# EAGLE board pr0board_main (EAGLE 9.6.2)
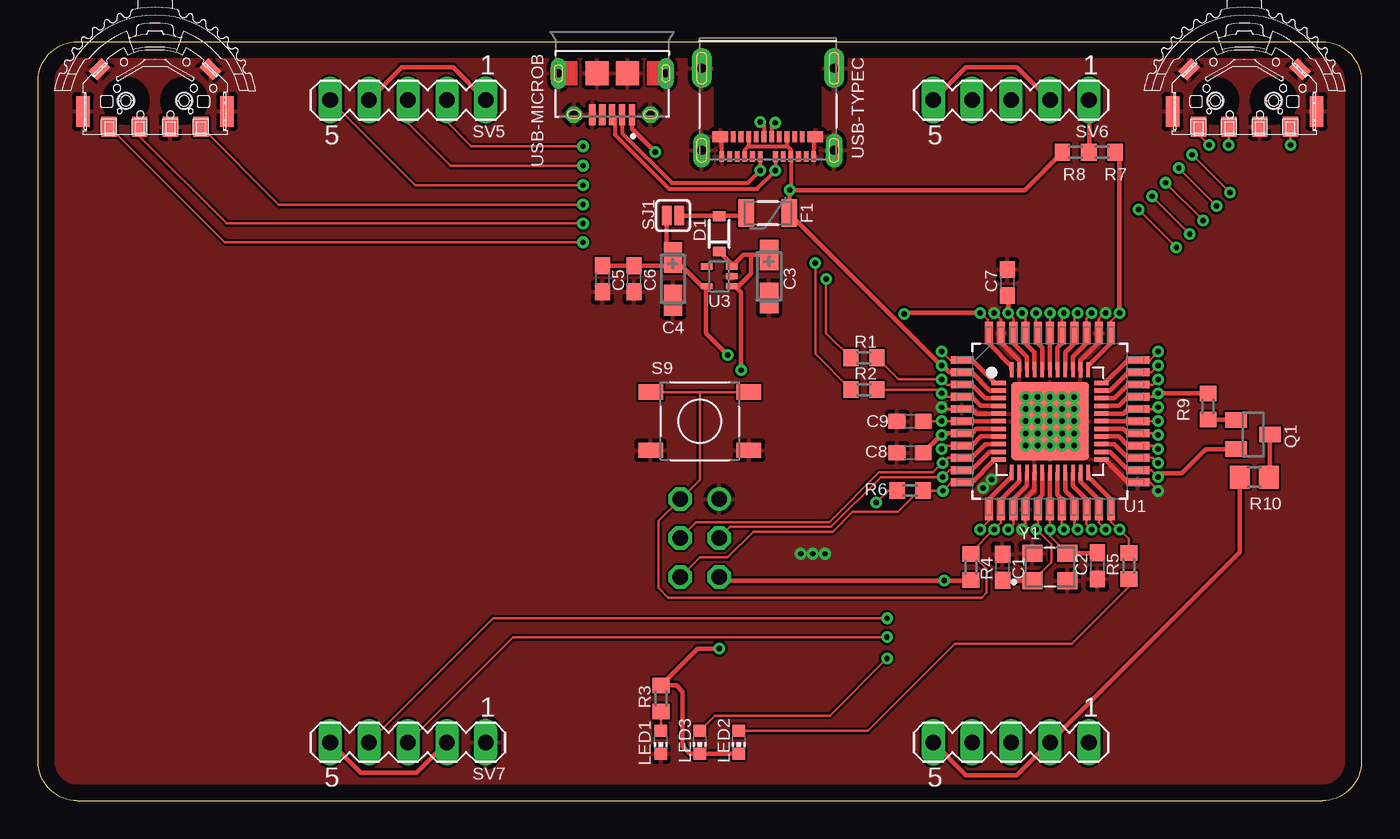
[diagram p0: board, top side]
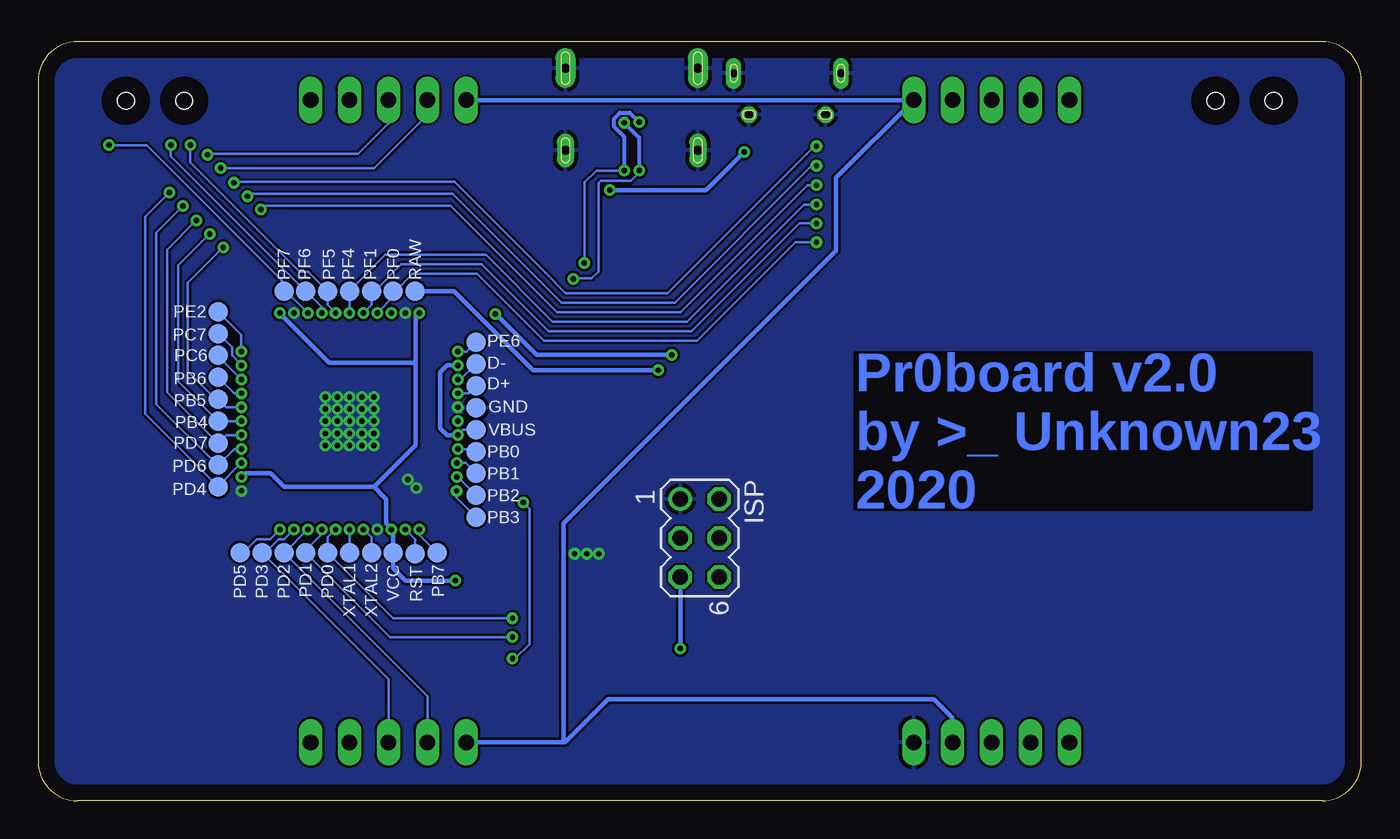
[diagram p1: board, bottom side, seen from below]

Size 86.36 x 49.53 mm. Coordinates in mm from the lower left corner, seen from the top.
Outline: 0,2.54 0,46.99 arc-90 2.54,49.53 83.82,49.53 arc-90 86.36,46.99 86.36,2.54 arc-90 83.82,0 2.54,0 arc-90 0,2.54
Copper layers (1*16): Top 0.035mm / dielectric 1.5mm / Bottom 0.035mm
Design rules "default": minimum track width 6mil, minimum drill 0.35mm, track to track 6mil, track to pad 6mil, pad to pad 6mil, via to via 6mil, smd to smd 6mil, copper to edge 40mil, drill to drill 6mil, minimum pad ring 10mil, minimum via ring 8mil, stop-mask expansion 4mil, vias tented up to drill 0mil, thermal gap 10mil

## Footprints (pad centres in the part's own frame; a part is rotated, then mirrored left to right if it is on the bottom)
C0603 = smd 1.1 x 1: 1 -0.85,0; 2 0.85,0
CT3216 = smd 2 x 1.2: + -1.4,0; - 1.4,0
SOD-323 = smd 0.63 x 0.83: 1 -1.15,0; 2 1.15,0
B1,27 = smd 1.27 x 1.27: TP 0,0
PTC-1206 = smd 1 x 1.8: 1 -1.4,0; 2 1.4,0
MA03-2 = drill 1.016: 1 -2.54,-1.27 | drill 1.016 octagon: 2 -2.54,1.27; 3 0,-1.27; 4 0,1.27; 5 2.54,-1.27; 6 2.54,1.27
CHIP-LED0603 = smd 0.8 x 0.8: A 0,-0.75; C 0,0.75
SOT23 = smd 1 x 1.4: 1 -0.95,-1.1; 2 0.95,-1.1; 3 0,1.1
R0603 = smd 1 x 1.1: 1 -0.85,0; 2 0.85,0
R0805 = smd 1.3 x 1.5: 1 -0.95,0; 2 0.95,0
SW_PTS525SM15SMTR2LFS = smd 1.6 x 1: 1 -3.2,1.9; 2 3.2,1.9; 3 -3.2,-1.9; 4 3.2,-1.9
SJ_2S = smd 0.635 x 1.27: 1 -0.412,0; 2 0.412,0
MA05-1 = drill 1.016 long: 1 -5.08,0; 2 -2.54,0; 3 0,0; 4 2.54,0; 5 5.08,0
QFP80P1200X1200X120-44N = smd 1.473 x 0.508: 1 -5.74,3.988; 2 -5.74,3.2; 3 -5.74,2.388; 4 -5.74,1.6; 5 -5.74,0.787; 6 -5.74,0; 7 -5.74,-0.787; 8 -5.74,-1.6; 9 -5.74,-2.388; 10 -5.74,-3.2; 11 -5.74,-3.988; 23 5.74,-3.988; 24 5.74,-3.2; 25 5.74,-2.388; 26 5.74,-1.6; 27 5.74,-0.787; 28 5.74,0; 29 5.74,0.787; 30 5.74,1.6; 31 5.74,2.388; 32 5.74,3.2; 33 5.74,3.988 | smd 0.508 x 1.473: 12 -3.988,-5.74; 13 -3.2,-5.74; 14 -2.388,-5.74; 15 -1.6,-5.74; 16 -0.787,-5.74; 17 0,-5.74; 18 0.787,-5.74; 19 1.6,-5.74; 20 2.388,-5.74; 21 3.2,-5.74; 22 3.988,-5.74; 34 3.988,5.74; 35 3.2,5.74; 36 2.388,5.74; 37 1.6,5.74; 38 0.787,5.74; 39 0,5.74; 40 -0.787,5.74; 41 -1.6,5.74; 42 -2.388,5.74; 43 -3.2,5.74; 44 -3.988,5.74
QFN44G-0.5-7X7MM = smd 1 x 0.3: 1 -3.35,2.5; 2 -3.35,2; 3 -3.35,1.5; 4 -3.35,1; 5 -3.35,0.5; 6 -3.35,0; 7 -3.35,-0.5; 8 -3.35,-1; 9 -3.35,-1.5; 10 -3.35,-2; 11 -3.35,-2.5; 23 3.35,-2.5; 24 3.35,-2; 25 3.35,-1.5; 26 3.35,-1; 27 3.35,-0.5; 28 3.35,0; 29 3.35,0.5; 30 3.35,1; 31 3.35,1.5; 32 3.35,2; 33 3.35,2.5 | smd 0.3 x 1: 12 -2.5,-3.35; 13 -2,-3.35; 14 -1.5,-3.35; 15 -1,-3.35; 16 -0.5,-3.35; 17 0,-3.35; 18 0.5,-3.35; 19 1,-3.35; 20 1.5,-3.35; 21 2,-3.35; 22 2.5,-3.35; 34 2.5,3.35; 35 2,3.35; 36 1.5,3.35; 37 1,3.35; 38 0.5,3.35; 39 0,3.35; 40 -0.5,3.35; 41 -1,3.35; 42 -1.5,3.35; 43 -2,3.35; 44 -2.5,3.35 | smd 5.08 x 5.08: TAB 0,0
SC70 = smd 0.4 x 0.75: 1 -0.65,-0.825; 2 0,-0.825; 3 0.65,-0.825; 4 0.65,0.825; 5 -0.65,0.825
TM-2024A = smd 1 x 1.3: 1 3,-0.95; 2 -3,-0.95; C 1,-0.95; T -1,-0.95 | smd 0.9 x 2: GND0 -4.7,0.05; GND3 4.7,0.05 | smd 1.2 x 0.8 rotated 45: GND1 -3.62,2.8 | smd 1.2 x 0.8 rotated 315: GND2 3.62,2.8 | hole 1.1: -1.9,0.75; 1.9,0.75
AMPHENOL_10118194-0001LF = smd 0.4 x 1.35: 1 -1.3,2.7; 2 -0.65,2.7; 3 0,2.7; 4 0.65,2.7; 5 1.3,2.7 | drill 0.55 pad 0.65 octagon: S1 -2.5,2.7; S2 2.5,2.7 | drill 0.5 pad 0.775 long: S3 -3.5,0; S6 3.5,0 | smd 1.5 x 1.55: S4 -1,0; S5 1,0
MOLEX_105450-0101 = smd 0.3 x 0.7: A1 -3,3.77; A2 -2.5,3.77; A3 -2,3.77; A4 -1.5,3.77; A5 -1,3.77; A6 -0.5,3.77; A7 0.5,3.77; A8 1,3.77; A9 1.5,3.77; A10 2,3.77; A11 2.5,3.77; A12 3,3.77; B2 2.25,2.47; B3 1.75,2.47; B4 1.25,2.47; B5 0.75,2.47; B6 0.25,2.47; B7 -0.25,2.47; B8 -0.75,2.47; B9 -1.25,2.47; B10 -1.75,2.47; B11 -2.25,2.47 | smd 1 x 0.7: B1 3.1,2.47; B12 -3.1,2.47 | drill 0.6 pad 1.1 long: S1 -4.32,3.36; S2 4.32,3.36 | drill 0.6 pad 1.3 long: S3 -4.32,-2; S4 4.32,-2
XTAL_ECS-160-18-33Q-DS = smd 1.3 x 1.1: 1 -1.15,-0.9; 2 1.15,-0.9; 3 1.15,0.9; 4 -1.15,0.9

## Placement (x,y rotation side)
C1  22pF  [C0603]  62.94,15.24 270 top
C2  22pF  [C0603]  69.14,15.32 90 top
C3  10uF  [CT3216]  47.7,34.21 270 top
C4  10uF  [CT3216]  41.43,34.05 270 top
C5  1uF  [C0603]  36.83,34.05 270 top
C6  1uF  [C0603]  38.89,34.05 270 top
C7  0.1uF  [C0603]  63.26,33.81 90 top
C8  1uF  [C0603]  56.91,22.7 180 top
C9  1uF  [C0603]  56.91,24.77 180 top
D1  B5817WS-SJ C114023  [SOD-323]  44.45,36.99 90 top
D+  TPB1,27  [B1,27]  57.78,27.07 0 bottom
D-  TPB1,27  [B1,27]  57.78,28.5 0 bottom
F1  MF-NSMF050-2 C75464  [PTC-1206]  47.62,38.34 180 top
GND  TPB1,27  [B1,27]  57.78,25.64 0 bottom
ISP  [MA03-2]  43.18,17.14 270 bottom
LED1  RED  [CHIP-LED0603]  40.64,3.81 180 top
LED2  Green  [CHIP-LED0603]  45.72,3.81 180 top
LED3  Yellow  [CHIP-LED0603]  43.18,3.81 180 top
PB0  TPB1,27  [B1,27]  57.78,22.78 0 bottom
PB1  TPB1,27  [B1,27]  57.78,21.35 0 bottom
PB2  TPB1,27  [B1,27]  57.78,19.92 0 bottom
PB3  TPB1,27  [B1,27]  57.78,18.49 0 bottom
PB4  TPB1,27  [B1,27]  74.61,24.77 0 bottom
PB5  TPB1,27  [B1,27]  74.61,26.19 0 bottom
PB6  TPB1,27  [B1,27]  74.61,27.62 0 bottom
PB7  TPB1,27  [B1,27]  60.33,16.19 0 bottom
PC6  TPB1,27  [B1,27]  74.61,29.05 0 bottom
PC7  TPB1,27  [B1,27]  74.61,30.48 0 bottom
PD0  TPB1,27  [B1,27]  67.47,16.19 0 bottom
PD1  TPB1,27  [B1,27]  68.9,16.19 0 bottom
PD2  TPB1,27  [B1,27]  70.33,16.19 0 bottom
PD3  TPB1,27  [B1,27]  71.75,16.19 0 bottom
PD4  TPB1,27  [B1,27]  74.61,20.48 0 bottom
PD5  TPB1,27  [B1,27]  73.18,16.19 0 bottom
PD6  TPB1,27  [B1,27]  74.61,21.91 0 bottom
PD7  TPB1,27  [B1,27]  74.61,23.34 0 bottom
PE2  TPB1,27  [B1,27]  74.61,31.91 0 bottom
PE6  TPB1,27  [B1,27]  57.78,29.92 0 bottom
PF0  TPB1,27  [B1,27]  63.18,33.26 0 bottom
PF1  TPB1,27  [B1,27]  64.61,33.26 0 bottom
PF4  TPB1,27  [B1,27]  66.04,33.26 0 bottom
PF5  TPB1,27  [B1,27]  67.47,33.26 0 bottom
PF6  TPB1,27  [B1,27]  68.9,33.26 0 bottom
PF7  TPB1,27  [B1,27]  70.33,33.26 0 bottom
Q1  MMBTA56-SOT23  [SOT23]  79.3,23.89 270 top
R1  22R  [R0603]  53.9,28.89 0 top
R2  22R  [R0603]  53.9,26.83 0 top
R3  22R  [R0603]  40.64,6.67 90 top
R4  10k  [R0603]  60.88,15.24 270 top
R5  330R  [R0603]  71.2,15.32 90 top
R6  330R  [R0603]  56.91,20.24 0 top
R7  NC  [R0603]  69.45,42.31 180 top
R8  0R  [R0603]  67.71,42.31 180 top
R9  1K  [R0603]  76.36,25.72 90 top
R10  22R  [R0805]  79.38,21.11 0 top
RAW  TPB1,27  [B1,27]  61.75,33.26 0 bottom
RST  TPB1,27  [B1,27]  61.75,16.11 0 bottom
S9  PTS525SM15SMTR2LFS  [SW_PTS525SM15SMTR2LFS]  43.18,24.77 0 top
SJ1  SOLDERJUMPERNC  [SJ_2S]  41.43,38.18 180 top
SV5  [MA05-1]  24.13,45.72 180 top
SV6  [MA05-1]  63.5,45.72 180 top
SV7  [MA05-1]  24.13,3.81 180 top
SV8  [MA05-1]  63.5,3.81 180 top
U1  ATMEGA32U4-AU C44854  [QFP80P1200X1200X120-44N]  66.04,24.77 0 top
U2  ATMEGA32U4-MUR C45874  [QFN44G-0.5-7X7MM]  66.04,24.77 0 top
U3  MIC5219-3.3YM5-TR C481375  [SC70]  44.45,34.21 90 top
U$2  TM-2024A  [TM-2024A]  7.62,44.93 0 top
U$3  TM-2024A  [TM-2024A]  78.74,44.93 0 top
USB-MICROB  10118194-0001LF C132563  [AMPHENOL_10118194-0001LF]  37.47,47.47 180 top
USB-TYPEC  1054500101 C134092  [MOLEX_105450-0101]  47.62,45.8 180 top
VBUS  TPB1,27  [B1,27]  57.78,24.21 0 bottom
VCC  TPB1,27  [B1,27]  63.18,16.19 0 bottom
XTAL1  TPB1,27  [B1,27]  66.04,16.19 0 bottom
XTAL2  TPB1,27  [B1,27]  64.61,16.19 0 bottom
Y1  X322516MOB4SI C12668  [XTAL_ECS-160-18-33Q-DS]  66.04,15.24 0 top

## Library data of the parts
C1-C9 = rcl; SPICEPREFIX: C
D1 F1 SJ1 U3 = SparkFun
D+ D- GND PB0 PB1-PB7 PC6 PC7 PD0 PD1-PD7 PE2 PE6 PF0 PF1 PF4-PF7 RAW RST VBUS VCC XTAL1 XTAL2 = testpad
ISP SV5-SV8 = con-lstb; OC_FARNELL: unknown; OC_NEWARK: unknown
LED1-LED3 = led
Q1 = transistor-pnp
R1-R8 = resistor
R9 R10 = rcl; SPICEPREFIX: R
S9 = PTS525SM15SMTR2LFS; AVAILABILITY: Warning; DESCRIPTION: Tactile Switch SPST-NO Top Actuated Surface Mount; MF: C&K; MOUSER-PURCHASE-URL: https://snapeda.com/shop?store=Mouser&id=756640; MP: PTS525SM15SMTR2LFS; PACKAGE: None; PRICE: None
U1 = ATMEGA32U4-AU; AVAILABILITY: Good; DESCRIPTION: AVR AVR® ATmega Microcontroller IC 8-Bit 16MHz 32KB (16K x 16) FLASH 44-TQFP (10x10); DIGIKEY-PURCHASE-URL: https://snapeda.com/shop?store=DigiKey&id=4251478; MF: Microchip Technology; MOUSER-PURCHASE-URL: https://snapeda.com/shop?store=Mouser&id=4251478; MP: ATMEGA32U4-AU; PACKAGE: TQFP-44 Microchip Technology; PRICE: None
U2 = MCU-ATMEGA32U4-MUR_VQFN44_; ARROW_ELECTRONICS-PURCHASE-URL: https://snapeda.com/shop?store=Arrow+Electronics&id=1750575; AVAILABILITY: Good; DESCRIPTION: AVR AVR® ATmega Microcontroller IC 8-Bit 16MHz 32KB (16K x 16) FLASH 44-VQFN (7x7); MF: Microchip; MOUSER-PURCHASE-URL: https://snapeda.com/shop?store=Mouser&id=1750575; MP: ATMEGA32U4-MUR; PACKAGE: VQFN-44 Microchip; PRICE: None
U$2 U$3 = TM-2024A
USB-MICROB = 10118194-0001LF; ARROW_ELECTRONICS-PURCHASE-URL: https://snapeda.com/shop?store=Arrow+Electronics&id=4816633; AVAILABILITY: Good; DESCRIPTION: USB - micro B USB 2.0 Receptacle Connector 5 Position Surface Mount, Right Angle; Through Hole; DIGIKEY-PURCHASE-URL: https://snapeda.com/shop?store=DigiKey&id=4816633; MF: Amphenol ICC (FCI); MOUSER-PURCHASE-URL: https://snapeda.com/shop?store=Mouser&id=4816633; MP: 10118194-0001LF; PACKAGE: None; PRICE: None
USB-TYPEC = 105450-0101; AVAILABILITY: Good; DESCRIPTION: USB-C (USB TYPE-C) USB 3.2 Gen 2 (USB 3.1 Gen 2, Superspeed + (USB 3.1)) Receptacle Connector 24 Position Surface Mount, Right Angle; Through Hole; DIGIKEY-PURCHASE-URL: https://snapeda.com/shop?store=DigiKey&id=448528; MF: Molex; MP: 1054500101; PACKAGE: None; PRICE: None
Y1 = ECS-160-18-33Q-DS; ARROW_ELECTRONICS-PURCHASE-URL: https://snapeda.com/shop?store=Arrow+Electronics&id=2121221; AVAILABILITY: Good; DESCRIPTION: 16MHz ±30ppm Crystal 18pF 80 Ohms 4-SMD, No Lead; DIGIKEY-PURCHASE-URL: https://snapeda.com/shop?store=DigiKey&id=2121221; MF: ECS Inc.; MOUSER-PURCHASE-URL: https://snapeda.com/shop?store=Mouser&id=2121221; MP: ECS-160-18-33Q-DS; PACKAGE: SMD-4 ECS International; PRICE: None

## Nets
AREF: C7.1 U1.42 U2.42
D+: D+.TP R2.2 U1.4 U2.4
D-: D-.TP R1.2 U1.3 U2.3
GND: C1.1 C2.1 C3.- C4.- C5.2 C6.2 C7.2 C8.2 C9.2 GND.TP ISP.1 LED1.C S9.3 S9.4 SV7.1 U1.5 U1.15 U1.23 U1.35 U1.43 U2.5 U2.15 U2.23 U2.35 U2.43 U2.TAB U3.2 U$2.C U$2.GND0 U$2.GND1 U$2.GND2 U$2.GND3 U$3.C U$3.GND0 U$3.GND1 U$3.GND2 U$3.GND3 USB-MICROB.5 USB-MICROB.S1 USB-MICROB.S2 USB-MICROB.S3 USB-MICROB.S4 USB-MICROB.S5 USB-MICROB.S6 USB-TYPEC.A1 USB-TYPEC.A12 USB-TYPEC.B1 USB-TYPEC.B12 USB-TYPEC.S1 USB-TYPEC.S2 USB-TYPEC.S3 USB-TYPEC.S4 Y1.2 Y1.4
IND+: R2.1 USB-MICROB.3 USB-TYPEC.A6 USB-TYPEC.B6
IND-: R1.1 USB-MICROB.2 USB-TYPEC.A7 USB-TYPEC.B7
KEY_LEDS: R10.1 SV5.1 SV5.4 SV6.2 SV6.5 SV7.2 SV7.5 SV8.2 SV8.5
N$1: D1.2 F1.2 SJ1.1
N$4: LED1.A R3.1
N$5: LED3.A R6.1
N$6: LED2.A R5.1
N$7: Q1.1 R9.1
N$11: Q1.3 R10.2
PB0: PB0.TP U1.8 U2.8
PB1: ISP.4 PB1.TP U1.9 U2.9
PB2: ISP.3 PB2.TP U1.10 U2.10
PB3: ISP.6 PB3.TP R6.2 U1.11 U2.11
PB4: PB4.TP SV5.3 U1.28 U2.28
PB5: PB5.TP SV5.5 U1.29 U2.29
PB6: PB6.TP R9.2 U1.30 U2.30
PB7: PB7.TP U1.12 U2.12
PC6: PC6.TP U1.31 U2.31
PC7: PC7.TP U1.32 U2.32
PD0: PD0.TP SV7.4 U1.18 U2.18
PD1: PD1.TP SV7.3 U1.19 U2.19
PD2: PD2.TP SV8.4 U1.20 U2.20
PD3: PD3.TP SV8.3 U1.21 U2.21
PD4: PD4.TP SV6.3 U1.25 U2.25
PD5: PD5.TP R5.2 U1.22 U2.22
PD6: PD6.TP SV6.4 U1.26 U2.26
PD7: PD7.TP SV5.2 U1.27 U2.27
PE2: PE2.TP U1.33 U2.33
PE6: PE6.TP U1.1 U2.1
PF0: PF0.TP U1.41 U2.41 U$2.2
PF1: PF1.TP U1.40 U2.40 U$2.T
PF4: PF4.TP U1.39 U2.39 U$2.1
PF5: PF5.TP U1.38 U2.38 U$3.2
PF6: PF6.TP U1.37 U2.37 U$3.T
PF7: PF7.TP U1.36 U2.36 U$3.1
RAW: C3.+ D1.1 RAW.TP U3.1 U3.3
RESET: ISP.2 R4.1 RST.TP S9.1 S9.2 U1.13 U2.13
UCAP: C9.1 U1.6 U2.6
UVCC: C8.1 F1.1 R8.2 U1.2 U1.7 U2.2 U2.7 USB-MICROB.1 USB-TYPEC.A4 USB-TYPEC.A9 USB-TYPEC.B4 USB-TYPEC.B9 VBUS.TP
VCC: C4.+ C5.1 C6.1 ISP.5 LED2.C LED3.C Q1.2 R3.2 R4.2 R7.1 SJ1.2 U1.14 U1.24 U1.34 U1.44 U2.14 U2.24 U2.34 U2.44 U3.5 VCC.TP
WS2812BDO: SV8.1
WSVCC: R7.2 R8.1 SV6.1
XTAL1: C2.2 U1.17 U2.17 XTAL1.TP Y1.3
XTAL2: C1.2 U1.16 U2.16 XTAL2.TP Y1.1

## Tracks (layer width: path | path; a pad name or v marks a point on that pad's centre or on a via)
AREF  (via drill 0.35)
  Top 0.152: U1.42 63.65,31.49 v63.31,31.83
  Top 0.3: U2.42 64.54,28.96 63.65,29.85 U1.42
  Top 0.305: C7.1 63.31,32.91 v63.31,31.83
D+  (via drill 0.35)
  Top 0.152: U1.4 59.19,26.36 v58.98,26.58 58.73,26.83 R2.2
  Top 0.3: U2.4 61.54,25.77 60.94,26.36 U1.4
  Bottom 0.152: v58.98,26.58 58.27,26.58 D+.TP
D-  (via drill 0.35)
  Top 0.152: U1.3 59.31,27.15 v58.98,27.49 56.15,27.49 R1.2
  Top 0.3: U2.3 61.84,26.27 60.95,27.15 U1.3
  Bottom 0.152: v58.98,27.49 58.79,27.49 D-.TP
GND  (via drill 0.35)
  Top 0.152: U1.5 59.1,25.55 v58.98,25.67 | U1.35 69.24,31.45 69.62,31.83 v69.67,31.83 | U1.43 62.84,31.39 v62.41,31.83 | U1.23 72.55,20.78 v73.1,20.22 | U1.15 64.44,17.93 v64.21,17.7
  Top 0.254: USB-TYPEC.A12 44.62,43.23 USB-TYPEC.B1 | USB-TYPEC.A1 50.62,43.23 USB-TYPEC.B12
  Top 0.3: U2.43 64.04,28.7 62.84,29.9 U1.43 | U2.35 68.04,28.7 69.24,29.9 U1.35 | U2.23 69.63,22.27 71.12,20.78 U1.23 | U2.15 65.04,20.27 64.44,19.67 U1.15 | U2.5 61.24,25.27 60.95,25.55 U1.5
  other vias: 66.83,24.77 67.63,24.77 65.25,24.77 64.45,24.77 66.04,25.56 66.83,25.56 67.63,25.56 65.25,25.56 64.45,25.56 64.45,23.97 65.25,23.97 66.04,23.97 66.83,23.97 67.63,23.97 67.63,23.18 66.83,23.18 66.04,23.18 65.25,23.18 64.45,23.18 64.45,26.35 65.25,26.35 66.04,26.35 66.83,26.35 67.63,26.35 49.77,16.11 62.23,20.95 61.67,20.4 66.04,24.77 50.56,16.11 51.36,16.11
  pour Bottom: -1.43,-8.49 -1.43,53.34 89.22,53.34 89.22,-8.49
  pour Top: -1.27,-8.65 -1.27,53.66 89.46,53.66 89.46,-8.65
IND+  (via drill 0.35)
  Top 0.152: R2.1 50.72,29.15 v50.72,35.08
  Top 0.254: USB-TYPEC.A6 48.12,41.14 v48.1,41.12 48.1,41.09 46.93,39.92 41.19,39.92 37.64,43.47 37.64,44.6 USB-MICROB.3 | v47.12,44.29 47.38,44.04 USB-TYPEC.B6
  Bottom 0.152: v48.1,41.12 49.93,41.12 50.69,40.35 50.69,35.19 50.69,35.11 v50.72,35.08
  Bottom 0.254: v47.12,44.29 47.16,44.29 47.76,44.9 48.39,44.9 48.77,44.51 48.77,43.97 48.1,43.3 v48.1,41.12
IND-  (via drill 0.35)
  Top 0.152: R1.1 51.44,30.5 v51.44,34.05
  Top 0.254: USB-TYPEC.A7 v47.12,41.14 v47.13,41.13 46.33,40.32 41.35,40.32 38.12,43.56 USB-MICROB.2 | v48.11,44.24 47.88,44 47.88,43.65 USB-TYPEC.B7
  Bottom 0.152: v47.13,41.13 47.13,40.97 47.66,40.45 49.62,40.45 49.8,40.27 49.8,34.52 50.23,34.08 51.25,34.08 51.2,34.03 51.41,34.03 v51.44,34.05
  Bottom 0.254: v48.11,44.24 47.13,43.26 v47.13,41.13
KEY_LEDS
  Top 0.305: SV7.5 21.03,1.83 24.69,1.83 SV7.2 | SV8.5 60.56,1.67 63.9,1.67 SV8.2 78.42,16.2 R10.1 | SV6.5 60.56,47.86 63.9,47.86 SV6.2 | SV5.4 23.73,47.86 27.07,47.86 SV5.1
  Bottom 0.305: SV6.5 SV5.1 34.29,40.64 34.29,35.88 52.07,18.1 52.07,3.81 | 52.07,3.81 51.96,3.81 49.16,6.61 27.89,6.61 26.67,5.4 SV7.2 26.67,5.05 | 52.07,3.81 SV8.5
N$1
  Top 0.305: F1.2 46.15,38.42 45.91,38.18 44.49,38.18 D1.2 44.41,38.18 SJ1.1
N$4
  Top 0.152: LED1.A R3.1
N$5  (via drill 0.35)
  Top 0.152: LED3.A 44.18,5.56 51.67,5.56 v55.4,9.29 | v54.69,19.45 55.48,20.24 R6.1
  Bottom 0.152: v54.69,19.45 54.29,19.05 54.29,10.22 55.22,9.29 v55.4,9.29
N$6
  Top 0.152: LED2.A 54.17,4.56 59.85,10.24 67.47,10.24 71.2,13.97 R5.1
N$7
  Top 0.305: R9.1 78.17,24.87 Q1.1
N$11
  Top 0.305: Q1.3 80.4,21.18 R10.2
PB0  (via drill 0.35)
  Top 0.152: U1.8 59.19,23.16 v58.98,22.95
  Top 0.3: U2.8 61.55,23.77 60.95,23.16 U1.8
  Bottom 0.152: PB0.TP 57.95,22.95 v58.98,22.95
PB1  (via drill 0.35)
  Top 0.152: U1.9 59.37,22.38 v59.03,22.04 58.41,21.42 54.88,21.42 51.64,18.18 42.94,18.18 ISP.4
  Top 0.3: U2.9 61.84,23.27 60.95,22.38 U1.9
  Bottom 0.152: PB1.TP 58.47,22.04 v59.03,22.04
PB2  (via drill 0.35)
  Top 0.152: U1.10 59.47,21.57 v59.03,21.13 59.02,21.11 55.01,21.11 51.75,17.86 45.16,17.86 ISP.3
  Top 0.3: U2.10 62.11,22.77 60.91,21.57 U1.10
  Bottom 0.152: PB2.TP 58.99,21.13 v59.03,21.13
PB3  (via drill 0.35)
  Top 0.152: U1.11 59.61,20.78 v59.05,20.22 | v59.05,20.22 57.78,20.22 R6.2 57.74,20.22 | ISP.6 43.18,15.88 45.01,15.88 46.69,17.55 51.88,17.55 53.16,18.84 56.11,18.84 57.49,20.22 57.74,20.22 | v59.05,20.22 57.82,20.22 57.78,20.22 57.74,20.22
  Top 0.3: U2.11 62.45,22.27 60.96,20.78 U1.11
  Bottom 0.152: PB3.TP 59.05,19.76 v59.05,20.22
PB4  (via drill 0.35)
  Top 0.152: U1.28 v73.1,24.77 | SV5.3 24.13,44.21 26.91,41.43 v35.56,41.43 | v75.17,36.99 75.15,36.99 v72.7,39.44
  Top 0.3: U2.28 U1.28
  Bottom 0.152: v73.1,24.77 PB4.TP 77.23,27.38 77.23,34.92 v75.17,36.99 | v72.7,39.44 72.54,39.6 59.3,39.6 52.21,32.51 44.81,32.51 35.88,41.43 v35.56,41.43
PB5  (via drill 0.35)
  Top 0.152: U1.29 72.98,25.55 v73.1,25.67 | SV5.5 24.61,40.16 v35.56,40.16 | v71.83,38.58 74.29,36.12 v74.29,36.11
  Top 0.3: U2.29 70.83,25.27 71.12,25.55 U1.29
  Bottom 0.152: v73.1,25.67 74.09,25.67 PB5.TP 74.77,26.19 76.6,28.02 76.6,33.8 v74.29,36.11 | v35.56,40.16 36.16,40.16 44.44,31.88 52.49,31.88 59.43,38.82 71.59,38.82 v71.83,38.58
PB6  (via drill 0.35)
  Top 0.152: U1.30 72.89,26.36 v73.1,26.58
  Top 0.3: U2.30 70.53,25.77 71.13,26.36 U1.30
  Top 0.305: v73.1,26.58 76.34,26.58 R9.2
  Bottom 0.152: PB6.TP 73.57,26.58 v73.1,26.58
PB7  (via drill 0.35)
  Top 0.152: U1.12 62.05,18.27 v61.49,17.7
  Top 0.3: U2.12 63.54,21.14 62.05,19.66 U1.12
  Bottom 0.152: PB7.TP 61.49,17.36 v61.49,17.7
PC6  (via drill 0.35)
  Top 0.152: U1.31 72.77,27.15 v73.1,27.49
  Top 0.3: U2.31 70.24,26.27 71.13,27.15 U1.31
  Bottom 0.152: PC6.TP 74.61,29 v73.1,27.49
PC7  (via drill 0.35)
  Top 0.152: U1.32 72.67,27.96 v73.1,28.4
  Top 0.3: U2.32 69.94,26.77 71.15,27.96 U1.32
  Bottom 0.152: PC7.TP 73.71,29.58 73.71,29.06 73.1,28.45 v73.1,28.4
PD0  (via drill 0.35)
  Top 0.152: U1.18 66.83,17.82 v66.95,17.7 | SV7.4 29.69,11.91 v55.4,11.91
  Top 0.3: U2.18 66.54,19.98 66.83,19.69 U1.18
  Bottom 0.152: v66.95,17.7 67.47,17.18 PD0.TP 63.18,11.91 v55.4,11.91
PD1  (via drill 0.35)
  Top 0.152: U1.19 67.64,17.92 v67.86,17.7 | SV7.3 31,10.68 v55.4,10.68
  Top 0.3: U2.19 67.04,20.23 67.64,19.63 U1.19
  Bottom 0.152: v67.86,17.7 67.86,17.38 68.9,16.34 PD1.TP 63.38,10.68 v55.4,10.68
PD2  (via drill 0.35)
  Top 0.152: U1.20 68.43,18.04 v68.77,17.7
  Top 0.3: U2.20 67.54,20.55 68.43,19.66 U1.20
  Bottom 0.152: v68.77,17.7 70.28,16.19 PD2.TP 60.96,6.83 SV8.4
PD3  (via drill 0.35)
  Top 0.152: U1.21 69.24,18.14 v69.67,17.7
  Top 0.3: U2.21 68.04,20.83 69.24,19.63 U1.21
  Bottom 0.152: v69.67,17.7 70.32,17.06 70.68,17.06 71.55,16.19 PD3.TP 63.5,7.94 SV8.3
PD4  (via drill 0.35)
  Top 0.152: U1.25 72.77,22.38 v73.1,22.04 | v77.79,39.69 v75.33,42.15
  Top 0.3: U2.25 70.24,23.27 71.13,22.38 U1.25
  Bottom 0.152: v73.1,22.04 74.61,20.53 PD4.TP 79.38,25.24 79.38,38.1 v77.79,39.69 | SV6.3 63.5,44.21 65.48,42.23 75.25,42.23 v75.33,42.15
PD5  (via drill 0.35)
  Top 0.152: U1.22 70.03,18.21 70.53,17.7 v70.58,17.7 71.2,17.09 R5.2
  Top 0.3: U2.22 68.54,21.14 70.03,19.66 U1.22
  Bottom 0.152: v70.58,17.7 71.23,17.06 72.11,17.06 72.98,16.19 PD5.TP
PD6  (via drill 0.35)
  Top 0.152: U1.26 72.89,23.16 v73.1,22.95 | v76.91,38.81 v74.45,41.27
  Top 0.3: U2.26 70.53,23.77 71.13,23.16 U1.26
  Bottom 0.152: v73.1,22.95 73.57,22.95 PD6.TP 74.69,21.91 78.66,25.88 78.66,37.07 v76.91,38.81 | SV6.4 60.96,44.77 64.45,41.27 v74.45,41.27
PD7  (via drill 0.35)
  Top 0.152: U1.27 72.98,23.98 v73.1,23.86 | SV5.2 26.67,44.29 28.26,42.7 v35.56,42.7 | v73.58,40.32 v76.04,37.86
  Top 0.3: U2.27 70.83,24.27 71.12,23.97 U1.27
  Bottom 0.152: v73.1,23.86 74.09,23.86 PD7.TP 77.94,26.66 77.94,35.97 v76.04,37.86 | v35.56,42.7 35.72,42.7 36.2,42.23 45.3,33.13 51.92,33.13 53.25,34.46 59.2,40.4 73.5,40.4 v73.58,40.32
PE2  (via drill 0.35)
  Top 0.152: U1.33 72.55,28.75 v73.1,29.31
  Top 0.3: U2.33 69.63,27.27 71.12,28.75 U1.33
  Bottom 0.152: v73.1,29.31 73.1,30.4 PE2.TP
PE6  (via drill 0.35)
  Top 0.152: U1.1 59.53,28.75 v58.98,29.31
  Top 0.3: U2.1 62.45,27.27 60.96,28.75 U1.1
  Bottom 0.152: v58.98,29.31 58.4,29.31 PE6.TP
PF0  (via drill 0.35)
  Top 0.152: U1.41 64.44,31.61 v64.22,31.83 | U$2.2 12.15,36.44 v35.56,36.44
  Top 0.3: U2.41 65.04,29.26 64.44,29.86 U1.41
  Bottom 0.152: v64.22,31.83 63.18,32.87 PF0.TP 63.02,33.26 61.91,34.37 57.7,34.37 53.35,30.02 43.35,30.02 36.92,36.44 v35.56,36.44
PF1  (via drill 0.35)
  Top 0.152: U1.40 65.13,30.63 v65.13,31.83 | U$2.T 6.62,43.34 12.29,37.67 v35.56,37.67
  Top 0.3: U2.40 65.54,29.56 65.25,29.85 U1.40
  Bottom 0.152: v65.13,31.83 64.61,32.35 PF1.TP 64.4,33.26 62.67,34.99 57.42,34.99 53.06,30.64 43.71,30.64 36.68,37.67 v35.56,37.67
PF4  (via drill 0.35)
  Top 0.152: U1.39 v66.04,31.83 | U$2.1 15.7,38.89 v35.56,38.89
  Top 0.3: U2.39 U1.39
  Bottom 0.152: v66.04,31.83 PF4.TP 66.04,33.29 63.72,35.61 57.13,35.61 52.78,31.26 44,31.26 36.37,38.89 v35.56,38.89
PF5  (via drill 0.35)
  Top 0.152: U1.38 66.83,31.71 v66.95,31.83 | U$3.2 75.74,43.48 v76.44,42.78
  Top 0.3: U2.38 66.54,29.55 66.83,29.84 U1.38
  Bottom 0.152: v66.95,31.83 67.47,32.35 PF5.TP 68.74,34.53 69.29,34.53 76.44,41.67 v76.44,42.78
PF6  (via drill 0.35)
  Top 0.152: U1.37 67.64,31.61 v67.86,31.83 | U$3.T 77.71,43.94 v77.71,42.78
  Top 0.3: U2.37 67.04,29.25 67.64,29.85 U1.37
  Bottom 0.152: v67.86,31.83 67.86,32.22 PF6.TP 77.71,42.07 v77.71,42.78
PF7  (via drill 0.35)
  Top 0.152: U1.36 68.43,31.49 v68.77,31.83 | U$3.1 81.74,42.8 v81.76,42.78
  Top 0.3: U2.36 67.54,28.96 68.43,29.85 U1.36
  Bottom 0.152: v68.77,31.83 69.95,33.01 70.33,33.01 PF7.TP 70.48,33.42 70.48,33.97 79.3,42.78 v81.76,42.78
RAW  (via drill 0.35)
  Top 0.305: D1.1 45.27,35.01 U3.3 46.02,35.61 46.51,35.61 | 46.51,35.61 C3.+ | U3.1 45.48,33.56 | 45.48,33.56 45.7,33.56 46.51,34.37 46.51,35.61 | v45.88,28.09 45.88,33.16 45.48,33.56
  Bottom 0.305: RAW.TP 61.74,33.24 59.22,33.24 54.07,28.09 v45.88,28.09
RESET  (via drill 0.35)
  Top 0.152: U1.13 62.84,18.14 v62.4,17.7 60.88,16.18 R4.1 60.95,16.09 61.9,15.14 61.9,13.56 61.6,13.26 41.12,13.26 40.48,13.89 40.48,18.26 ISP.2 43.18,20.95 43.18,26.66 | S9.1 43.18,26.66 | 43.18,26.66 46.2,26.66
  Top 0.3: U2.13 64.04,20.83 62.84,19.63 U1.13
  Top 0.305: 46.2,26.66 S9.2
  Bottom 0.152: RST.TP 61.75,17.06 v62.4,17.7
UCAP  (via drill 0.35)
  Top 0.152: U1.6 v58.98,24.77 C9.1
  Top 0.3: U2.6 U1.6
UVCC  (via drill 0.35)
  Top 0.254: USB-TYPEC.A9 46.12,42.47 46.38,42.72 | USB-TYPEC.B4 46.38,42.72 | 46.38,42.72 46.4,42.7 48.85,42.7 48.88,42.72 | USB-TYPEC.B9 48.88,42.72 | 48.88,42.72 49.13,42.47 49.13,42.04 USB-TYPEC.A4 49.13,39.92 v49.05,39.84 | U1.2 60.94,27.96
  Top 0.3: U2.7 61.25,24.27 60.97,23.98 | U2.2 62.13,26.77 60.94,27.96
  Top 0.305: USB-MICROB.1 38.77,43.84 v40.27,42.34 | U1.2 59.49,27.96 59.05,28.4 v58.98,28.4 58.92,28.4 49.02,38.29 F1.1 49.02,39.82 v49.05,39.84 64.39,39.84 R8.2 | 60.97,23.98 U1.7 59.1,23.98 v58.98,23.86 58.92,23.86 C8.1
  Bottom 0.152: VBUS.TP 58.62,24.21 v58.98,23.86
  Bottom 0.305: v49.05,39.84 42.76,39.84 v40.27,42.34 | v58.98,23.86 59.69,23.86 60.13,24.3 60.13,27.95 59.69,28.4 v58.98,28.4
VCC  (via drill 0.35)
  Top 0.152: U1.34 70.03,31.27 v70.58,31.83 | U1.44 61.99,30.57 61.99,31.38 61.55,31.83 v61.5,31.83 | U1.24 72.67,21.57 v73.1,21.13 | U1.14 63.65,18.05 v63.31,17.7
  Top 0.254: U2.34 68.54,28.38 | U2.44 63.54,28.35 | U1.14 63.65,19.68
  Top 0.3: U2.14 64.54,20.57 63.65,19.68 | 63.54,28.35 62.05,29.84 U1.44 | U1.24 71.15,21.57 69.94,22.77 U2.24 | U1.34 70.03,29.86 68.54,28.38
  Top 0.305: v73.1,21.13 73.33,21.36 74.64,21.36 76.23,22.94 Q1.2 | C5.1 C6.1 40.88,34.9 C4.+ | C4.+ 43.33,33.56 U3.5 43.6,33.54 43.6,30.5 v45.01,29.09 | C4.+ 41.02,35.86 SJ1.2 | v70.58,31.83 70.58,42.03 R7.1 | LED2.C LED3.C 42.55,3.06 42.07,3.54 42.07,7.12 41.67,7.52 R3.2 43.04,9.92 v44.45,9.92 | ISP.5 44.69,14.37 v59.13,14.37 60.86,14.37 R4.2 | v61.5,31.83 56.58,31.83 v56.52,31.77
  Bottom 0.305: v44.45,9.92 ISP.5 | 64.45,20.47 63.66,19.68 63.66,18.11 63.31,17.76 v63.31,17.7 63.18,17.58 VCC.TP 63.18,15.16 62.39,14.37 v59.13,14.37 | 64.45,20.47 64.47,20.5 70.33,20.5 71.2,21.37 72.87,21.37 v73.1,21.13 | v61.5,31.83 61.72,31.6 61.72,28.57 | 64.45,20.47 61.72,23.2 61.72,28.57 | v70.58,31.83 70.36,31.6 70.36,31.55 67.39,28.57 61.72,28.57 | v45.01,29.09 53.84,29.09 v56.52,31.77
WSVCC
  Top 0.254: SV6.1 68.6,45.7
  Top 0.305: 68.6,45.7 R7.2 R8.1
XTAL1  (via drill 0.35)
  Top 0.152: U1.17 v66.04,17.7 66.04,17.29 Y1.3
  Top 0.3: U2.17 U1.17
  Top 0.305: C2.2 69.11,16.14 Y1.3
  Bottom 0.152: XTAL1.TP v66.04,17.7
XTAL2  (via drill 0.35)
  Top 0.152: U1.16 65.25,17.82 65.15,17.72 | 65.15,17.72 v65.13,17.7 | Y1.1 66.12,15.57 66.12,16.75 65.15,17.72
  Top 0.3: U2.16 65.54,19.98 65.25,19.68 U1.16
  Top 0.305: C1.2 62.99,14.34 Y1.1
  Bottom 0.152: XTAL2.TP 64.61,17.18 v65.13,17.7

## Text on the board
Bottom: Pr0board v2.0 / by >_ Unknown23 / 2020